# Altium PCB LCD.PcbDoc
Units mm, origin at the board's own origin, x right, y up, seen from the top; angles counter-clockwise.
Board outline 60.07 x 56.01 mm, 2 copper layers (Top Layer, Bottom Layer); 36 components, 19 nets, 151 pads, 29 vias.
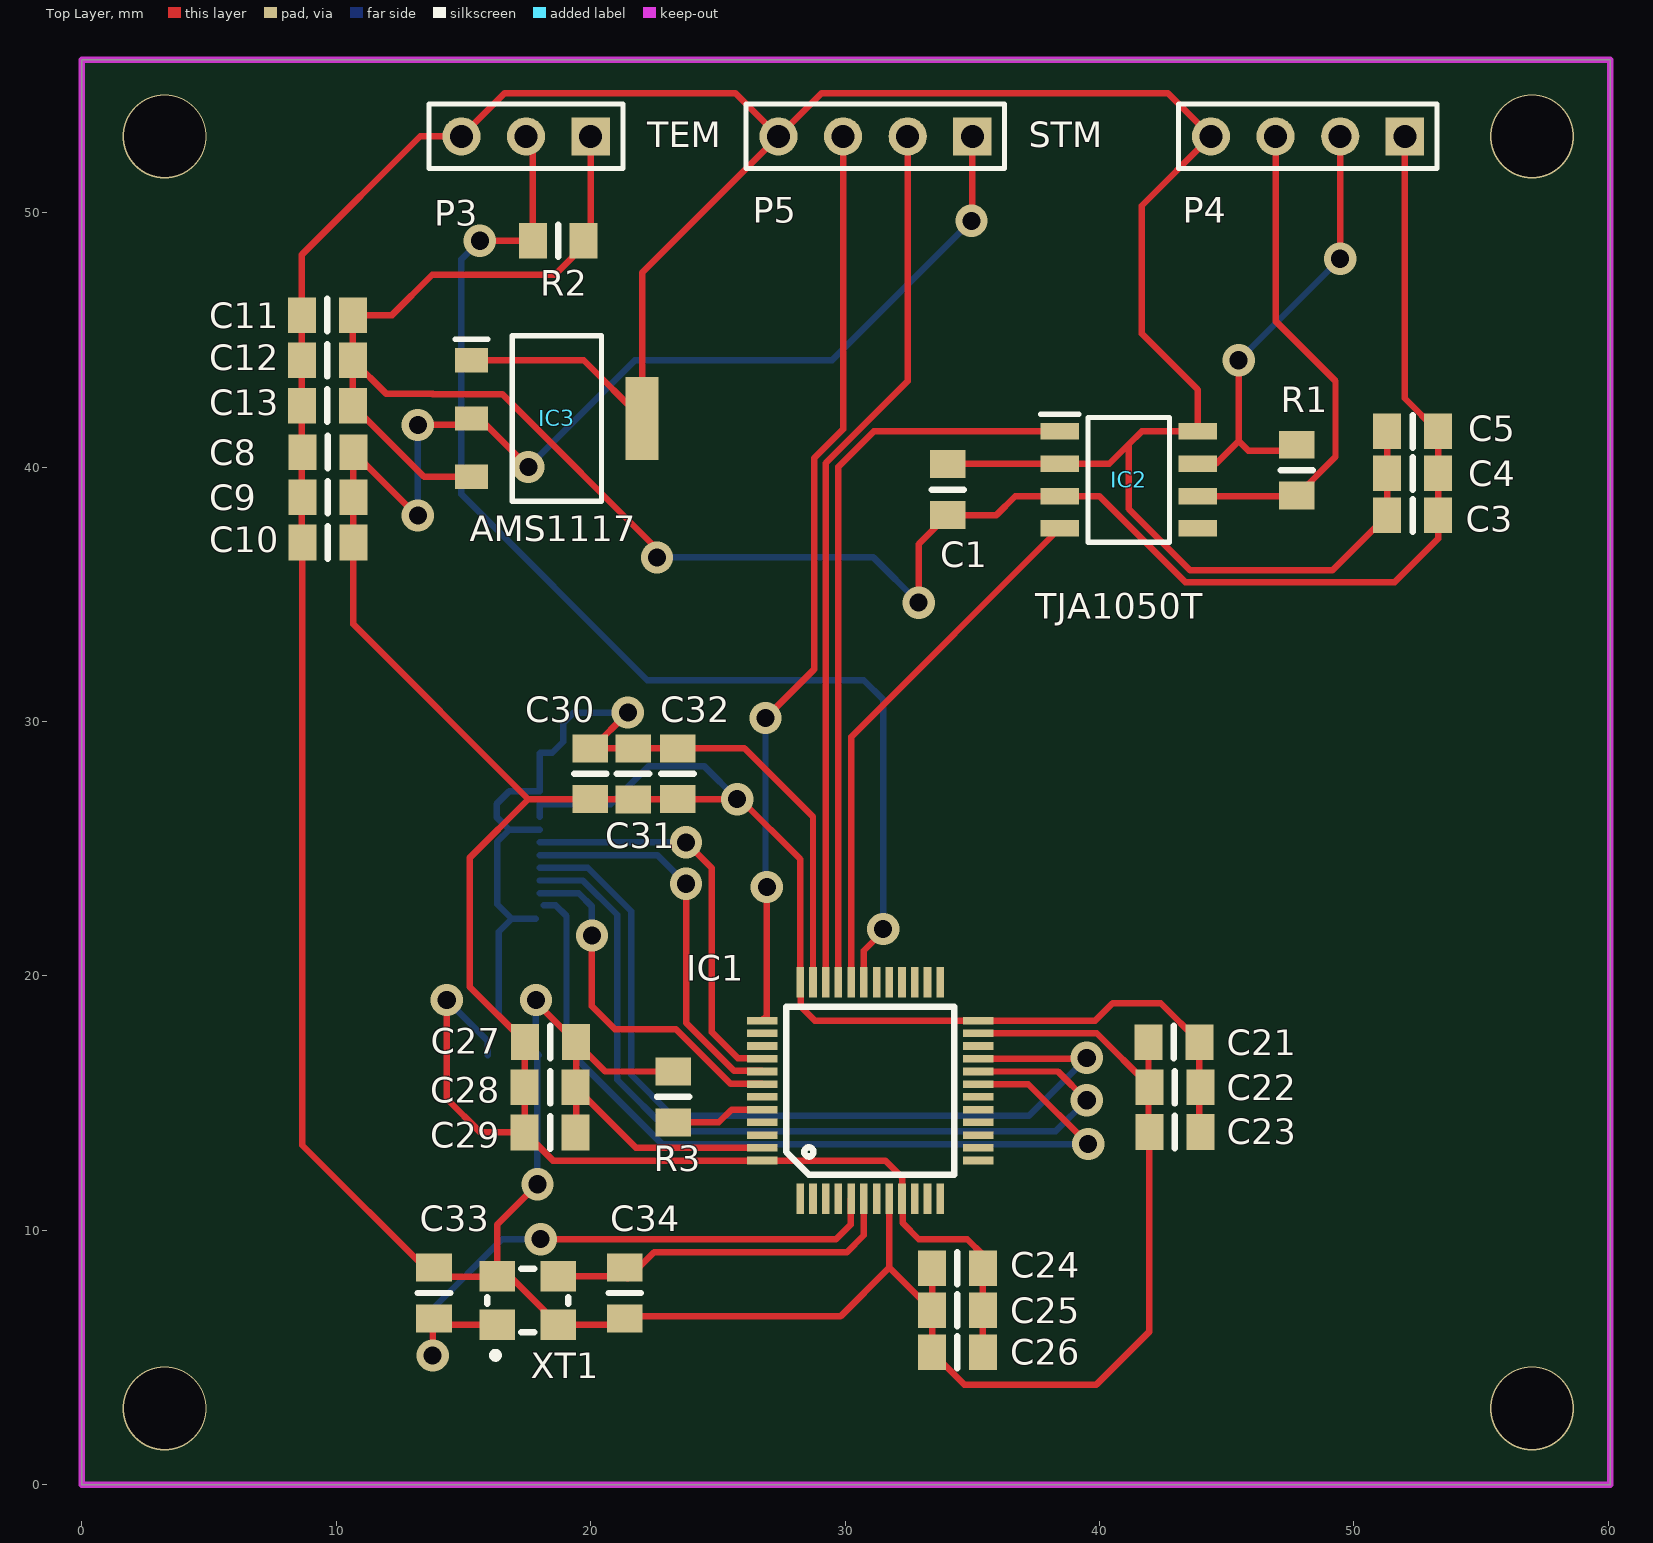
[diagram p0: Top Layer view]
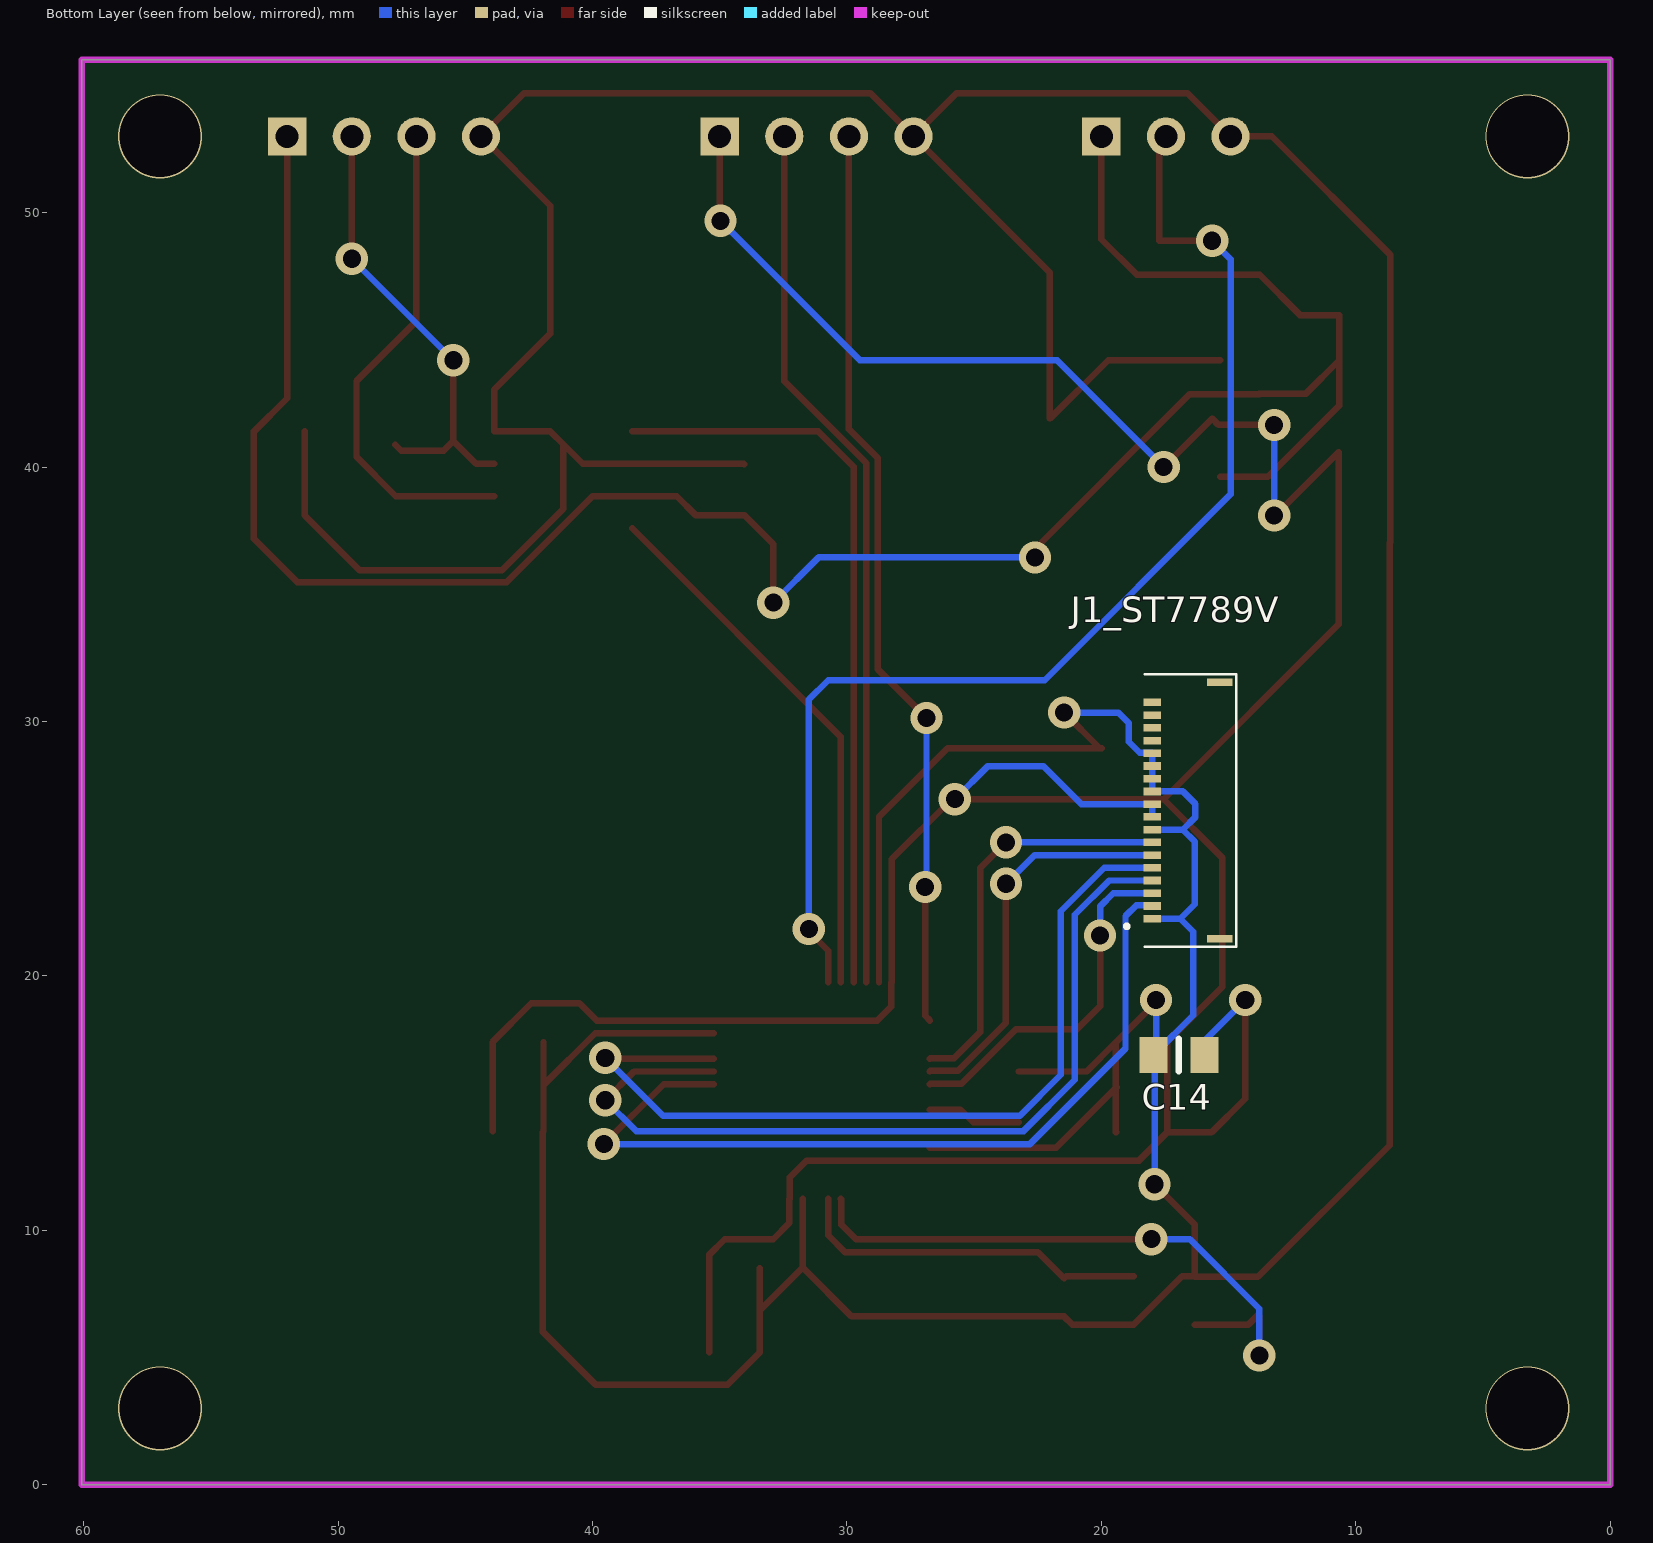
[diagram p1: Bottom Layer view, seen from below]
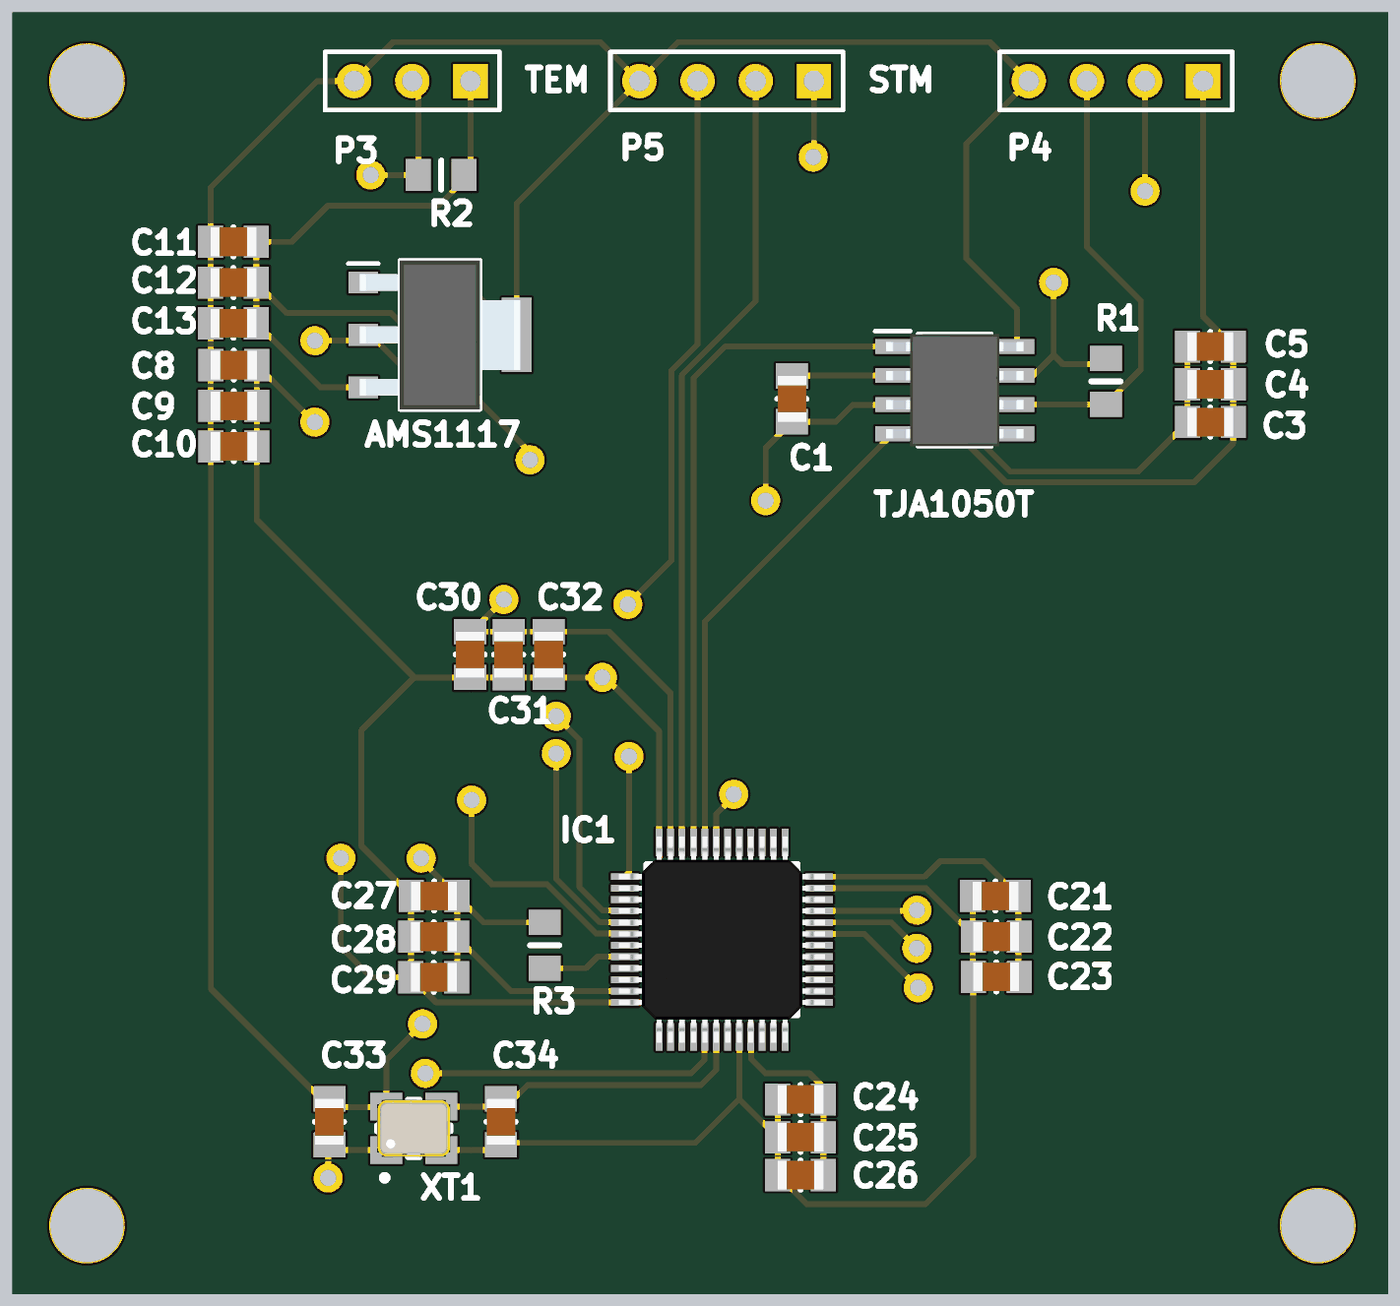
[diagram p2: 3D render of the assembled board from above, using the file's embedded part models]

## Layer stack, top to bottom
Top Solder: solder mask 0.0102, Solder Resist, Dk 3.5
Top Layer: signal copper 0.0356
Dielectric 1: dielectric 0.32, FR-4, Dk 4.8
Bottom Layer: signal copper 0.0356
Bottom Solder: solder mask 0.0102, Solder Resist, Dk 3.5

## Board outline
0,0 0,56.007 60.071,56.007 60.071,0

## Design rules (kind name [scope] priority, off if disabled: settings)
Clearance [All] p1: gap=0.203 ignorepadtopadclearanceinfootprint=TRUE
PolygonConnect [All] p1: connectstyle=Relief reliefconductorwidth=0.254 reliefentries=4 polygonreliefangle="90 Angle" airgapwidth=0.254
RoutingVias [All] p1: holewidth=0.711 width=1.27 viastyle="Through Hole" minholewidth=0.711 minwidth=1.27 maxholewidth=0.711 maxwidth=1.27
ShortCircuit [InNet('GND')] p1: allowed=FALSE
SolderMaskExpansion [All] p1: expansion=0.102
Width [All] p1: maxlimit=2 minlimit=0.15 preferedwidth=0.254
29 further rules are at their usual default settings.

## Components (designator, comment, footprint, x,y, rotation, side; value= is the part's Value field where it differs from the comment)
C1 "Cap Semi" C0805 34.036,39.116 r90 top value=47uF
C3 "Cap Semi" C0805 52.308,38.1 r0 top value=100nF
C4 "Cap Semi" C0805 52.308,39.751 r0 top value=100nF
C5 "Cap Semi" C0805 52.308,41.402 r0 top value=100nF
C8 "Cap Semi" C0805 9.668,40.59 r180 top value=100pF
C9 "Cap Semi" C0805 9.668,38.812 r180 top value=100nF
C10 "Cap Semi" C0805 9.668,37.034 r180 top value=100uF
C11 "Cap Semi" C0805 9.652,45.974 r0 top value=100pF
C12 "Cap Semi" C0805 9.652,44.196 r0 top value=100nF
C13 "Cap Semi" C0805 9.652,42.418 r0 top value=100uF
C14 "Cap Semi" C0805 16.95,16.891 r180 bottom value=100nF
C21 "Cap Semi" C0805 42.926,17.399 r180 top value=100uF
C22 "Cap Semi" C0805 42.964,15.621 r180 top value=100nF
C23 "Cap Semi" C0805 42.964,13.863 r180 top value=100pF
C24 "Cap Semi" C0805 34.417,8.509 r0 top value=100pF
C25 "Cap Semi" C0805 34.417,6.858 r0 top value=100nF
C26 "Cap Semi" C0805 34.417,5.207 r0 top value=100uF
C27 "Cap Semi" C0805 18.415,17.403 r180 top value=100uF
C28 "Cap Semi" C0805 18.402,15.621 r180 top value=100nF
C29 "Cap Semi" C0805 18.402,13.847 r180 top value=100pF
C30 "Cap Semi" C0805 19.987,27.948 r90 top value=100pF
C31 "Cap Semi" C0805 21.666,27.94 r90 top value=100nF
C32 "Cap Semi" C0805 23.416,27.948 r90 top value=100uF
C33 "22uF" C0805 13.843,7.537 r90 top
C34 "22uF" C0805 21.336,7.537 r270 top
IC1 "STM32F103C8T6" LQFP48 30.988,15.494 r0 top
IC2 "TJA1050T" SOIC127P600X175-8N 41.148,39.497 r0 top
IC3 "AMS1117-3.3" SOT229P700X180-4N 18.669,41.91 r0 top
J1_ST7789V "5034801800" 5034801800 16.5,26.5 r90 bottom
P3 "PC_Tem" HDR1X3 20,53 r180 top
P4 "Header" HDR1X4 52,53 r180 top
P5 "Header" HDR1X4 35,53 r180 top
R1 "120R" R0805 47.752,39.878 r90 top
R2 "Res3" R0805 18.726,48.895 r180 top value=4.7K
R3 "10K" R0805 23.241,15.244 r90 top
XT1 "8Mhz" 3225-P 17.526,7.247 r0 top

## Footprints (in the part's own frame and the unit in brackets; to place one, negate y for a bottom-side part, rotate by r counter-clockwise, add the part's x,y. Pads: shape width x height; smd on the part's side, far side on the other; paste and mask are expansions set on the pad)
3225-P [mm]
  rect 1.4x1.2 smd: 1(-1.2,-0.95) 2(-1.2,0.95) 2(1.2,-0.95) 3(1.2,0.95)
  silkscreen extent -1.6,-2.29 1.6,1.25, body extent -1.6,-1.25 1.6,1.25, height 0.61
5034801800 [mm]
  rect 0.3x0.7 smd: 1(-4.25,1.5) 2(-3.75,1.5) 3(-3.25,1.5) 4(-2.75,1.5) 5(-2.25,1.5) 6(-1.75,1.5) 7(-1.25,1.5) 8(-0.75,1.5) 9(-0.25,1.5) 10(0.25,1.5) 11(0.75,1.5) 12(1.25,1.5) 13(1.75,1.5) 14(2.25,1.5) 15(2.75,1.5) 16(3.25,1.5) 17(3.75,1.5) 18(4.25,1.5)
  rect 0.3x1 smd: MP1(-5.04,-1.15) MP2(5.04,-1.15)
  silkscreen extent -5.35,-1.8 5.35,2.55, body extent -5.35,-1.86 5.35,1.74, height 1.88
C0805 [mm]
  rect 1.1x1.4 smd: 1(-1,0) 2(1,0)
  silkscreen extent 0,-0.64 0,0.64, body extent -1,-0.62 1,0.63, height 0.6
HDR1X3 [mm] "Connector; Header; 3 Position"
  rect 1.5x1.5 hole 0.9: 1(0,0)
  round 1.5 hole 0.9: 2(2.54,0) 3(5.08,0)
  silkscreen extent -1.27,-1.27 6.35,1.27
HDR1X4 [mm] "Connector; Header; 4 Position"
  rect 1.5x1.5 hole 0.9: 1(0,0)
  round 1.5 hole 0.9: 2(2.54,0) 3(5.08,0) 4(7.62,0)
  silkscreen extent -1.27,-1.27 8.89,1.27
LQFP48 [mm]
  rect 0.3x1.2 smd: 1(-2.75,-4.25) 2(-2.25,-4.25) 3(-1.75,-4.25) 4(-1.25,-4.25) 5(-0.75,-4.25) 6(-0.25,-4.25) 7(0.25,-4.25) 8(0.75,-4.25) 9(1.25,-4.25) 10(1.75,-4.25) 11(2.25,-4.25) 12(2.75,-4.25) 25(2.75,4.25) 26(2.25,4.25) 27(1.75,4.25) 28(1.25,4.25) 29(0.75,4.25) 30(0.25,4.25) 31(-0.25,4.25) 32(-0.75,4.25) 33(-1.25,4.25) 34(-1.75,4.25) 35(-2.25,4.25) 36(-2.75,4.25)
  rect 1.2x0.3 smd: 13(4.25,-2.75) 14(4.25,-2.25) 15(4.25,-1.75) 16(4.25,-1.25) 17(4.25,-0.75) 18(4.25,-0.25) 19(4.25,0.25) 20(4.25,0.75) 21(4.25,1.25) 22(4.25,1.75) 23(4.25,2.25) 24(4.25,2.75) 37(-4.25,2.75) 38(-4.25,2.25) 39(-4.25,1.75) 40(-4.25,1.25) 41(-4.25,0.75) 42(-4.25,0.25) 43(-4.25,-0.25) 44(-4.25,-0.75) 45(-4.25,-1.25) 46(-4.25,-1.75) 47(-4.25,-2.25) 48(-4.25,-2.75)
  silkscreen extent -3.3,-3.3 3.3,3.3, body extent -4.5,-4.5 4.5,4.5, height 1.47
R0805 [mm]
  rect 1.1x1.4 smd: 1(-1,0) 2(1,0)
  silkscreen extent 0,-0.64 0,0.64, body extent -0.25,0.25 -0.25,0.25, height 0.25
SOIC127P600X175-8N [mm]
  rect 1.525x0.65 smd: 1(-2.712,1.905) 2(-2.712,0.635) 3(-2.712,-0.635) 4(-2.712,-1.905) 5(2.712,-1.905) 6(2.712,-0.635) 7(2.712,0.635) 8(2.712,1.905)
  silkscreen extent -3.47,-2.45 1.6,2.58, body extent -3,-2.45 3,2.45, height 1.75
SOT229P700X180-4N [mm]
  rect 1.3x0.95 smd: 1(-3.35,2.29) 2(-3.35,0) 3(-3.35,-2.29)
  rect 1.3x3.25 smd: 4(3.35,0)
  silkscreen extent -4,-3.25 1.75,3.25, body extent -3.5,-3.25 3.5,3.25, height 1.8

## Part data
C1 C3 C4 C5 C8 C9 C10 C11 C12 C13 C14 C21 C22 C23 C24 C25 C26 C27 C28 C29 C30 C31 C32: "Capacitor (Semiconductor SIM Model)", LatestRevisionDate=29-May-2009, LatestRevisionNote="IPC-7351 Footprint Added.", PackageDescription="Chip Capacitor", PackageReference=C1206, Published=8-Jun-2000, Publisher="Altium Limited"
C33 C34: library part Cap
IC2: "Integrated Circuit", Manufacturer_Name=NXP, Mouser Part Number=N/A, Datasheet Link=https://datasheet.datasheetarchive.com/originals/distributors/Datasheets-NXP/DSANXP010005907.pdf, Height=1.75mm, Manufacturer_Part_Number=TJA1050T, Mouser Price/Stock=https://www.mouser.co.uk/ProductDetail/NXP-Semiconductors/TJA1050T?qs=WhRErS6oET%252B5mtiFrt9ZMQ%3D%3D
IC3: "Integrated Circuit", Manufacturer_Name=Advanced, Datasheet Link=https://datasheet.datasheetarchive.com/originals/distributors/Datasheets-28/DSA-550594.pdf, Height=1.8mm, Manufacturer_Part_Number=AMS1117-3.3
J1_ST7789V: "Connector", Manufacturer_Name=Molex, Arrow Part Number=5034801800, Arrow Price/Stock=https://www.arrow.com/en/products/503480-1800/molex?region=nac, Datasheet Link=https://www.arrow.com/en/products/503480-1800/molex, Height=2.12mm, Manufacturer_Part_Number=5034801800
P3: library part "Header 3", LatestRevisionDate=17-Jul-2002, LatestRevisionNote="Re-released for DXP Platform.", Publisher="Altium Limited"
P4: library part "Header 4", "to debug", LatestRevisionDate=17-Jul-2002, LatestRevisionNote="Re-released for DXP Platform.", Publisher="Altium Limited"
P5: library part "Header 4", LatestRevisionDate=17-Jul-2002, LatestRevisionNote="Re-released for DXP Platform.", Publisher="Altium Limited"
R1: library part Res3, "Resistor", LatestRevisionDate=29-May-2009, LatestRevisionNote="IPC-7351 Footprint Added.", PackageDescription="Chip Resistor", PackageReference=J1-0603, Published=8-Jun-2000, Publisher="Altium Limited"
R2: "Resistor", LatestRevisionDate=29-May-2009, LatestRevisionNote="IPC-7351 Footprint Added.", PackageDescription="Chip Resistor", PackageReference=J1-0603, Published=8-Jun-2000, Publisher="Altium Limited"
R3: library part Resistor_1
XT1: library part "Passive Crystal"

## Via types
v1: diameter 1.27, hole 0.711, Top Layer to Bottom Layer, 25 vias
v2: diameter 3.3, hole 3.2, Top Layer to Bottom Layer, 4 vias

## Nets (pads, with @x,y where several pads share a name; then routed paths per layer and width w, separated by ;. In a path a pad name is that pad's centre, name@x,y a point inside that pad or via, vN(x,y) a via of type N, cw(c..) or ccw(c..) an arc to the next point about the centre after c; other vN are vias at no path point)
3.3v: C8.1 C9.1 C10.1 C14.2 C21.1 C22.1 C23.1 C24.2 C25.2 C26.2 C27.2 C28.2 C29.2 C30.1 C31.1 C32.1 IC1.9 IC1.24 IC1.36 IC1.48 IC3.2 J1_ST7789V.9 J1_ST7789V.10 P5.1 | length 151
  Top Layer w0.254: v1(13.208,38.1) 13.158,38.1 C8.1 C9.1 C10.1 10.668,33.83 17.55,26.948 ; v1(13.208,41.656) 15.391,41.656 15.645,41.91 v1(17.55,40.005) ; v1(14.343,19.05) 14.343,15.177 15.673,13.847 C29.2 ; v1(34.97,49.679) 35,49.709 P5.1 ; C26.2 C25.2 C24.2 35.417,9.033 34.798,9.652 32.9,9.652 32.258,10.294 32.258,11.224 IC1.9 32.238,12.085 31.579,12.744 IC1.48 18.518,12.744 17.415,13.847 C29.2 ; C23.1@43.926,13.901 C21.1 42.402,18.923 40.513,18.923 39.834,18.244 IC1.24 28.808,18.244 28.258,18.794 28.258,19.724 IC1.36 28.238,24.594 25.884,26.948 v1(25.758,26.948) C32.1 19.987,26.948 17.55,26.948 ; C29.2 C28.2 17.402,17.39 C27.2 15.24,19.578 15.24,24.638 17.55,26.948
  Bottom Layer w0.254: v1(13.208,38.1) v1(13.208,41.656) ; v1(14.343,19.05) 15.95,17.443 C14.2 ; v1(17.55,40.005) 21.741,44.196 29.487,44.196 v1(34.97,49.679) ; J1_ST7789V.9 J1_ST7789V.10 20.781,26.75 22.281,28.25 24.456,28.25 v1(25.758,26.948)
5V: C1.1 C3.2 C4.2 C5.2 C11.2 C12.2 C13.2 IC2.3 IC3.3 P3.1 P4.1 R2.1 | length 92.3
  Top Layer w0.254: IC3.3 13.45,39.62 C13.2 C12.2 ; P3.1 20,48.956 18.602,47.558 13.776,47.558 12.192,45.974 C11.2 C12.2 ; v1@22.774,36.617 16.519,42.872 13.787,42.872 13.784,42.875 11.973,42.875 C12.2 ; v1(32.893,34.671) 32.893,36.973 C1.1 35.947,38.116 36.683,38.852 39.999,38.852 43.371,35.48 51.609,35.48 53.308,37.179 C3.2 C4.2 C5.2 52,42.71 P4.1
  Bottom Layer w0.254: v1(22.606,36.449) 31.115,36.449 v1(32.893,34.671)
CAN_RX: IC1.32 IC2.4 | length 21.2
  Top Layer w0.254: IC1.32 30.238,29.394 IC2.4
CAN_TX: IC1.33 IC2.1 | length 29.5
  Top Layer w0.254: IC1.33 29.738,40.014 31.126,41.402 IC2.1
CSX: IC1.21 J1_ST7789V.5 | length 34.5
  Top Layer w0.254: IC1.21 39.463,16.744 v1(39.497,16.778)
  Bottom Layer w0.254: J1_ST7789V.5 19.884,24.25 21.59,22.544 21.59,16.117 23.209,14.498 37.217,14.498 v1(39.497,16.778)
D/C: IC1.20 J1_ST7789V.4 | length 34.6
  Top Layer w0.254: IC1.20 38.366,16.244 v1(39.497,15.113)
  Bottom Layer w0.254: J1_ST7789V.4 19.693,23.75 21.041,22.402 21.041,15.916 23.056,13.901 38.285,13.901 v1(39.497,15.113)
GND: C1.2 C3.1 C4.1 C5.1 C8.2 C9.2 C10.2 C11.1 C12.1 C13.1 C14.1 C21.2 C22.2 C23.2 C24.1 C25.1 C26.1 C27.1 C28.1 C29.1 C30.2 C31.2 C32.2 C33.2 C34.2 IC1.8 IC1.23 IC1.35 IC1.47 IC2.2 IC2.8 IC3.1 IC3.4 J1_ST7789V.1 J1_ST7789V.8 J1_ST7789V.11 J1_ST7789V.12 J1_ST7789V.13 J1_ST7789V.14 P3.3 P4.4 P5.4 R3.2 XT1.2 | length 272.1
  Top Layer w0.254: IC3.1 19.729,44.2 IC3.4 22.019,47.639 P5.4 ; v1@17.78,11.684 16.326,10.23 XT1.2@16.326,8.197 ; v1(17.848,19.05) 17.848,18.97 C27.1 C27.1@19.428,17.39 ; C28.1 C28.1@19.428,15.595 ; C29.1@19.415,13.847 19.428,13.86 C28.1@19.428,15.595 ; C30.2 C30.2@20.058,28.948 ; v1(21.463,30.353) C30.2@20.058,28.948 ; R3.2 20.574,16.244 C27.1@19.428,17.39 ; IC1.47 21.779,13.244 C28.1@19.428,15.595 ; IC1.35 28.738,26.253 26.043,28.948 C32.2 C30.2@20.058,28.948 ; IC1.8 31.738,8.537 ; C24.1 C25.1 ; C1.2 34.052,40.132 IC2.2 40.386,40.132 41.148,40.894 ; IC1.23 39.896,17.744 C22.2@41.926,15.713 ; C21.2 C22.2@41.926,15.713 ; C5.1 C4.1 C3.1 49.145,35.937 43.565,35.937 41.148,38.354 41.148,40.894 ; XT1.2@16.326,8.197 16.826,8.197 18.726,6.297 21.144,6.297 21.463,6.616 29.817,6.616 31.738,8.537 ; XT1.2@16.326,8.197 16.301,8.172 13.843,8.172 8.668,13.347 C10.2 8.652,37.05 8.652,38.812 C13.1 C12.1 C11.1 8.652,48.353 13.299,53 P3.3 16.623,54.703 25.677,54.703 P5.4 ; C28.1@19.428,15.595 C27.1@19.428,17.39 ; P5.4 29.083,54.703 42.677,54.703 P4.4 41.656,50.276 41.656,45.25 43.86,43.046 IC2.8 41.656,41.402 41.148,40.894 ; 31.738,8.537 C25.1 ; C25.1 C26.1 34.687,3.937 39.878,3.937 41.964,6.023 C23.2 41.926,13.901 C22.2@41.926,15.713
  Bottom Layer w0.254: v1(17.848,19.05) C14.1@17.848,16.993 ; J1_ST7789V.1@17.848,22.25 16.895,22.25 ; v1(17.907,11.811) 17.907,16.848 C14.1 C14.1@17.848,16.993 ; J1_ST7789V.8 16.795,25.75 ; v1(21.463,30.353) 19.334,30.353 18.923,29.942 18.923,29.206 18.487,28.77 18.02,28.77 J1_ST7789V.14 J1_ST7789V.13 J1_ST7789V.12 J1_ST7789V.11 16.793,27.25 16.301,26.758 16.301,26.244 16.795,25.75 ; 16.795,25.75 16.326,25.281 16.326,22.819 16.895,22.25 ; 16.895,22.25 16.383,21.738 16.383,18.458 C14.1@17.848,16.993
NetC33_1: C33.1 IC1.5 XT1.1 | length 24.9
  Top Layer w0.254: v1(13.787,5.08) 13.787,6.616 13.843,6.672 14.218,6.297 XT1.1 ; v1(18.034,9.652) 29.643,9.652 30.218,10.227 30.218,11.224 IC1.5
  Bottom Layer w0.254: v1(13.787,5.08) 13.787,6.921 16.518,9.652 v1(18.034,9.652)
NetC34_1: C34.1 IC1.6 XT1.3 | length 14.2
  Top Layer w0.254: XT1.3 21.382,8.197 21.463,8.116 22.491,9.144 30.075,9.144 30.738,9.807 IC1.6
NetIC1_44: IC1.44 R3.1 | length 3.7
  Top Layer w0.254: R3.1 25.039,14.244 25.539,14.744 IC1.44
NetIC2_6: IC2.6 P4.3 R1.1 | length 19.6
  Top Layer w0.254: IC2.6 47.736,38.862 R1.1 49.276,40.402 49.276,43.385 46.92,45.741 P4.3
NetIC2_7: IC2.7 P4.2 R1.2 | length 18.1
  Top Layer w0.254: IC2.7 44.577,40.132 45.47,41.025 ; v1(45.47,44.2) 45.47,41.025 ; R1.2 47.514,40.64 45.855,40.64 45.47,41.025 ; v1(49.46,48.19) P4.2
  Bottom Layer w0.254: v1(45.47,44.2) v1(49.46,48.19)
RESET: IC1.19 J1_ST7789V.2 | length 33.6
  Top Layer w0.254: IC1.19 37.201,15.744 v1(39.554,13.391)
  Bottom Layer w0.254: J1_ST7789V.2@18.161,22.77 18.632,22.77 19.05,22.352 19.05,17.145 22.804,13.391 v1(39.554,13.391)
SCL: IC1.42 J1_ST7789V.3 | length 14.1
  Top Layer w0.254: v1(20.05,21.59) 20.05,18.812 20.955,17.907 23.353,17.907 25.496,15.764 26.718,15.764 IC1.42
  Bottom Layer w0.254: J1_ST7789V.3 19.533,23.25 20.05,22.733 v1(20.05,21.59)
SDI: IC1.41 J1_ST7789V.6 | length 15.5
  Top Layer w0.254: v1(23.749,23.622) 23.749,18.157 25.642,16.264 26.718,16.264 IC1.41
  Bottom Layer w0.254: J1_ST7789V.6 22.621,24.75 v1(23.749,23.622)
SDO: IC1.40 J1_ST7789V.7 | length 16
  Top Layer w0.254: v1(23.749,25.25) 24.765,24.234 24.765,17.787 25.788,16.764 26.718,16.764 IC1.40
  Bottom Layer w0.254: J1_ST7789V.7 v1(23.749,25.25)
SWCLK: IC1.37 P5.3 | length 36.1
  Top Layer w0.254: IC1.37 26.924,18.43 v1(26.924,23.495) ; v1(26.872,30.136) 28.781,32.045 28.781,40.349 29.92,41.488 P5.3
  Bottom Layer w0.254: v1(26.872,30.136) 26.872,23.547 v1(26.924,23.495)
SWDIO: IC1.34 P5.2 | length 34.6
  Top Layer w0.254: IC1.34 29.238,40.16 32.46,43.382 P5.2
TEM: IC1.31 P3.2 R2.2 | length 48.3
  Top Layer w0.254: v1(15.645,48.895) R2.2 17.726,52.734 P3.2 ; IC1.31 30.738,20.986 31.496,21.744 v1(31.496,21.841)
  Bottom Layer w0.254: v1(15.645,48.895) 14.92,48.17 14.92,38.928 22.225,31.623 30.734,31.623 31.496,30.861 v1(31.496,21.841) v1@31.242,21.587
pads on no net: IC1.1 IC1.2 IC1.3 IC1.4 IC1.7 IC1.10 IC1.11 IC1.12 IC1.13 IC1.14 IC1.15 IC1.16 IC1.17 IC1.18 IC1.22 IC1.25 IC1.26 IC1.27 IC1.28 IC1.29 IC1.30 IC1.38 IC1.39 IC1.43 IC1.45 IC1.46 IC2.5 J1_ST7789V.15 J1_ST7789V.16 J1_ST7789V.17 J1_ST7789V.18 J1_ST7789V.MP1 J1_ST7789V.MP2
copper on no net:
  other v2: 3.254,3 57,3 3.254,53 57,53

## Keep-outs
Keep-Out Layer:
  the board outline again, w0.254

## Silkscreen, mask and mechanical layers (free items; w line width, h text height)
Top Overlay:
  text "TEM" at 22.225,52.578 h1
  text "STM" at 37.211,52.578 h1
  text "AMS1117" at 15.24,37.084 h1
  text "TJA1050T" at 37.465,34.036 h1